# Altium PCB FS-00.PcbDoc
Units mm, origin at the board's own origin, x right, y up, seen from the top; angles counter-clockwise.
Board outline 194.8 x 15.3 mm, 2 copper layers (Top Layer, Bottom Layer), stack 1.571 mm thick; 34 components, 23 nets, 85 pads, 9 vias.
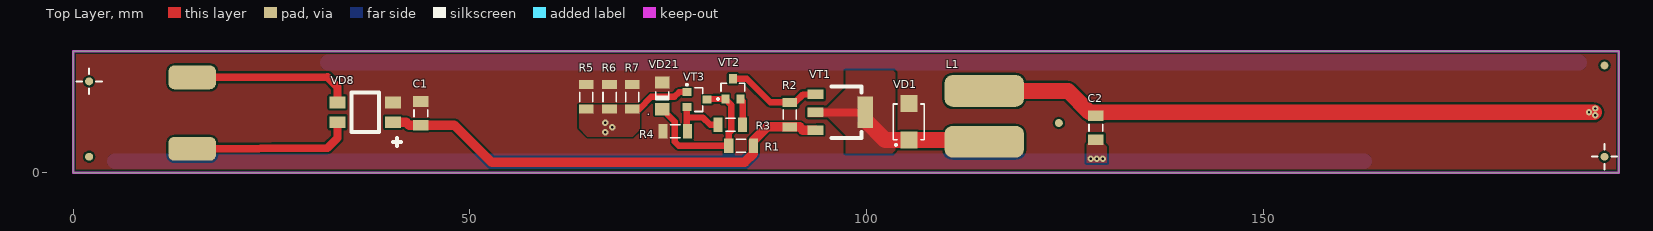
[diagram p0: Top Layer view]
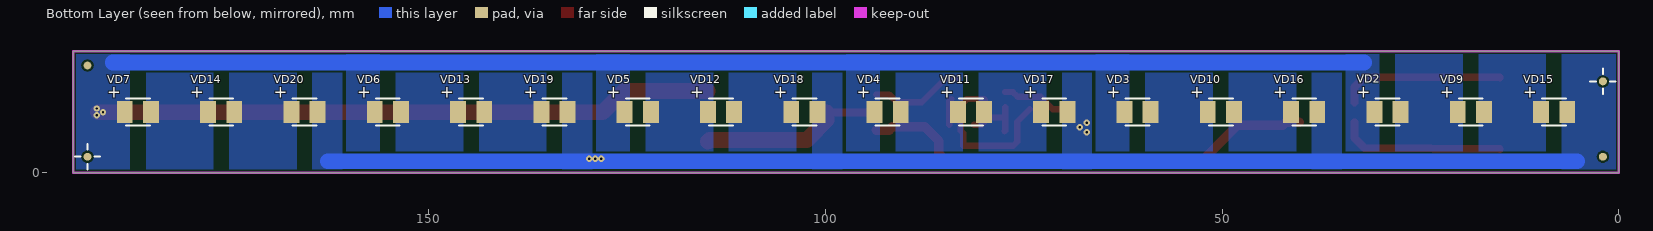
[diagram p1: Bottom Layer view, seen from below]
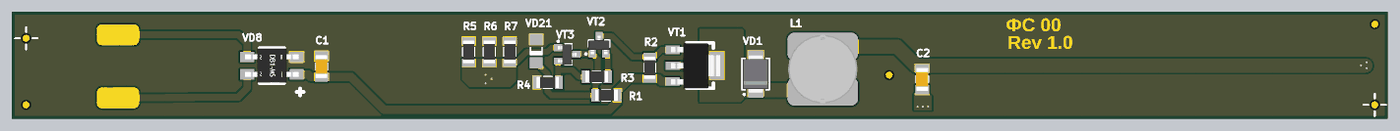
[diagram p2: 3D render of the assembled board from above, using the file's embedded part models]
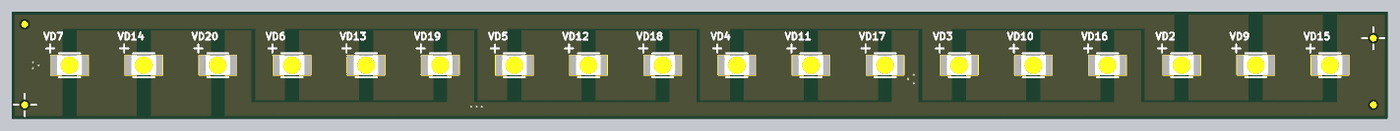
[diagram p3: 3D render of the assembled board from below, using the file's embedded part models]

## Layer stack, top to bottom
Top Solder: solder mask 0.0102, Solder Resist, Dk 3.5
Top Layer: signal copper 0.0356
Dielectric 1: dielectric 1.5, FR-4, Dk 4.8
Bottom Layer: signal copper 0.0356
Bottom Solder: solder mask 0.0102, Solder Resist, Dk 3.5

## Board outline
0,0 0,15.3 194.8,15.3 194.8,0

## Design rules (kind name [scope] priority, off if disabled: settings)
Clearance [All] p1: gap=0.254 ignorepadtopadclearanceinfootprint=FALSE except(0: Arc-Hole Track-Hole SMDPad-Hole THPad-Hole Via-Hole Fill-Hole Poly-Hole Region-Hole Text-Hole)
PolygonConnect [All] p1: thpad.connectstyle=Relief thpad.reliefconductorwidth=0.254 thpad.reliefentries=4 thpad.polygonreliefangle="90 Angle" thpad.airgapwidth=0.254 smdpad.connectstyle=Direct smdpad.reliefconductorwidth=0.254 smdpad.reliefentries=4 smdpad.polygonreliefangle="90 Angle" smdpad.airgapwidth=0.254 via.connectstyle=Direct via.reliefconductorwidth=0.254 via.reliefentries=4 via.polygonreliefangle="90 Angle" via.airgapwidth=0.254
RoutingVias [All] p1: holewidth=0.711 width=1.27 viastyle="Through Hole" minholewidth=0.711 minwidth=1.27 maxholewidth=0.711 maxwidth=1.27
SolderMaskExpansion [All] p1: expansion=0.102
Width [All] p1: maxlimit=5 minlimit=0.254 preferedwidth=2
30 further rules are at their usual default settings.

## Components (designator, comment, footprint, x,y, rotation, side; value= is the part's Value field where it differs from the comment)
C1 "Capacitor" CAP1206 43.825,7.475 r270 top value="0.1 uF"
C2 "Capacitor" CAP1206 128.9,5.65 r90 top value="4.7 uF"
L1 "coil" SDR1006 114.825,7.1 r90 top value=SDR1006-101KL
R1 "Resistor" RES1206 84.175,3.375 r0 top value="10 kOm"
R2 "Resistor" RES1206 90.325,7.3 r90 top value="120 Om"
R3 "Resistor" RES1206 82.825,6.025 r0 top value="240 Om"
R4 "Resistor" RES1206 75.875,5.2 r0 top value="10 Om"
R5 "Resistor" RES1206 64.675,9.55 r270 top value="5.6 Om"
R6 "Resistor" RES1206 67.6,9.55 r270 top value="5.6 Om"
R7 "Resistor" RES1206 70.475,9.55 r270 top value="5.6 Om"
VD1 "Schottky" SMB1 105.325,6.4 r90 top value=SS210
VD2 "LED" LED_SAKURA 29.15,7.65 r180 bottom value=SEL-2835-R62-2V060
VD3 "LED" LED_SAKURA 60.65,7.65 r180 bottom value=SEL-2835-R62-2V060
VD4 "LED" LED_SAKURA 92.15,7.65 r180 bottom value=SEL-2835-R62-2V060
VD5 "LED" LED_SAKURA 123.65,7.65 r180 bottom value=SEL-2835-R62-2V060
VD6 "LED" LED_SAKURA 155.15,7.65 r180 bottom value=SEL-2835-R62-2V060
VD7 "LED" LED_SAKURA 186.65,7.65 r180 bottom value=SEL-2835-R62-2V060
VD8 "Diode Bridge" db-1ms 36.8,7.6 r270 top value=B1S
VD9 "LED" LED_SAKURA 18.65,7.65 r180 bottom value=SEL-2835-R62-2V060
VD10 "LED" LED_SAKURA 50.15,7.65 r180 bottom value=SEL-2835-R62-2V060
VD11 "LED" LED_SAKURA 81.65,7.65 r180 bottom value=SEL-2835-R62-2V060
VD12 "LED" LED_SAKURA 113.15,7.65 r180 bottom value=SEL-2835-R62-2V060
VD13 "LED" LED_SAKURA 144.65,7.65 r180 bottom value=SEL-2835-R62-2V060
VD14 "LED" LED_SAKURA 176.15,7.65 r180 bottom value=SEL-2835-R62-2V060
VD15 "LED" LED_SAKURA 8.15,7.65 r180 bottom value=SEL-2835-R62-2V060
VD16 "LED" LED_SAKURA 39.65,7.65 r180 bottom value=SEL-2835-R62-2V060
VD17 "LED" LED_SAKURA 71.15,7.65 r180 bottom value=SEL-2835-R62-2V060
VD18 "LED" LED_SAKURA 102.65,7.65 r180 bottom value=SEL-2835-R62-2V060
VD19 "LED" LED_SAKURA 134.15,7.65 r180 bottom value=SEL-2835-R62-2V060
VD20 "LED" LED_SAKURA 165.65,7.65 r180 bottom value=SEL-2835-R62-2V060
VD21 "Zenner" minimelf 74.25,9.675 r90 top value=BZV55-C8V2
VT1 "PNP" SOT223 95.125,7.5 r270 top value=BCP53
VT2 "NPN" "SOT 23" 83.15,10.55 r90 top value=MMBTA42
VT3 "NPN" "SOT 23" 78.625,9.2 r0 top value=BC847C

## Footprints (in the part's own frame and the unit in brackets; to place one, negate y for a bottom-side part, rotate by r counter-clockwise, add the part's x,y. Pads: shape width x height; smd on the part's side, far side on the other; paste and mask are expansions set on the pad)
CAP1206 [mm]
  rect 1.35x1.95 smd: 1(-1.5,0) 2(1.5,0)
  silkscreen extent -0.45,-0.88 0.45,0.88, body extent -1.65,-0.85 1.65,0.85, height 1.5
db-1ms [mm]
  rect 1.5x2 smd: 1(1.25,3.5) 2(-1.25,3.5) 3(-1.25,-3.5) 4(1.25,-3.5)
  silkscreen extent -2.5,-1.75 4.25,4.5, body extent -2.45,-3.8 2.45,3.8, height 2.9
LED_SAKURA [mm]
  rect 2x2.8 smd: 1(1.651,0) 2(-1.651,0)
  silkscreen extent -1.5,-1.7 1.5,1.7, body extent -1.78,-1.4 1.78,1.4, height 0.7
minimelf [mm] "MELF Diode, 2-Leads, Body 3,50x1,65mm, IPC Medium Density"
  rect 1.55x1.85 smd: 1(-1.675,0) 2(1.675,0)
  silkscreen extent -0.5,-0.83 0.5,0.83, body extent -1.85,-0.85 1.85,0.85, height 1.69
RES1206 [mm] "Chip Resistor, 2-Leads, Body 3,20x1,60mm, IPC Medium Density"
  rect 1.15x1.85 smd: 1(-1.55,0) 2(1.55,0)
  silkscreen extent -0.6,-0.82 0.6,0.82, body extent -1.6,-0.8 1.6,0.8, height 0.6
SDR1006 [mm]
  rrect50% 4x10 smd: 1(-3.2,0) 2(3.2,0)
  body extent -4.9,-4.9 4.9,4.9, height 5.8
SMB1 [mm] "Molded Diode, 2-Leads, Body 4,25x3,60mm, IPC Medium Density"
  rect 2.1x2.15 smd: 1(-2.3,0) 2(2.3,0)
  silkscreen extent -3.02,-1.95 2.25,1.95, body extent -2.7,-1.8 2.7,1.8, height 2.3
SOT223 [mm]
  rect 1.2x2 smd: 1(-2.35,-1.55) 2(-0.1,-1.55) 3(2.15,-1.55)
  rect 4x2 smd: 2(-0.1,4.7)
  silkscreen extent -3.35,0.45 3.15,4.2, body extent -3.35,-1.78 3.15,5.18, height 1.7
"SOT 23" [mm] "SOT23, 3-Leads, Body 2,90x2,45mm, Pitch 0,95mm, IPC Medium Density"
  rect 1.15x1 smd: 1(-1.275,0.95) 2(-1.275,-0.95) 3(1.275,0)
  silkscreen extent -1.4,-1.5 0.7,2, body extent -1.3,-1.5 1.3,1.5, height 1.1

## Free pads (board coordinates)
  rrect50% 6x3 smd paste-3: 1(15,3) 1(15,12)
  round 1 smd far side paste-3 mask+0.2: 2(2,2) 2(2,11.5) 2(193,2) 2(193,13.5)
  round 1 smd paste-3 mask+0.2: 2(2,2) 2(2,11.5) 2(124.225,6.25) 2(193,2) 2(193,13.5)

## Via types
v1: diameter 0.8, hole 0.3, Top Layer to Bottom Layer, tented both sides, 9 vias

## Nets (pads, with @x,y where several pads share a name; then routed paths per layer and width w, separated by ;. In a path a pad name is that pad's centre, name@x,y a point inside that pad or via, vN(x,y) a via of type N, cw(c..) or ccw(c..) an arc to the next point about the centre after c; other vN are vias at no path point)
GND: C1.1 R4.1 R5.1 R6.1 R7.1 VD1.2 VD8.2 VD21.2
NetC1_2: C1.2 R1.2 R2.1 VD8.1 VT1.3 | length 58.3
  Top Layer w1.2: VD8.1 41.95,6.35 42.325,5.975 C1.2 48.05,5.975 52.725,1.3 84.625,1.3 85.725,2.4 R1.2 85.725,4.025 87.45,5.75 R2.1 91.55,5.75 91.95,5.35 VT1.3
NetC2_1: C2.1 R5.2 R6.2 R7.2 VD15.1 VD16.1 VD17.1 VD18.1 VD19.1 VD20.1 VT3.1 | length 165.2
  Top Layer w0.8: R7.2 71.325,8 72.875,9.55 75.775,9.55 76.375,10.15 VT3.1
  Bottom Layer w2: 5.271,1.425 162.675,1.425
  other v1: 128.25,1.75 129,1.75 129.75,1.75 67.05,5.075 67.925,5.7 67.075,6.275
NetC2_2: C2.2 L1.2 VD2.2 VD3.2 VD4.2 VD5.2 VD6.2 VD7.2 | length 235.7
  Top Layer w2: L1.2 125.375,10.3 128.075,7.6 191.675,7.6
  Bottom Layer w2: 32.125,13.875 189.825,13.875
  other v1: 191.85,7.225 191.05,7.625 191.85,8.075
NetL1_1: L1.1 VD1.1 VT1.2 | length 23.4
  Top Layer w1: VT1.2@93.575,7.6 VT1.2@99.825,7.6
  Top Layer w2: VT1.2@99.825,7.6 99.825,6.625 102.35,4.1 VD1.1 114.625,4.1 L1.1
NetR1_1: R1.1 VD21.1 VT2.1 VT3.3 | length 20.5
  Top Layer w0.8: VD21.1 75.825,6.425 75.825,3.875 76.325,3.375 R1.1 82.625,4.95 82.95,5.275 82.95,8.525 VT2.1 79.975,9.275 VT3.3
NetR2_2: R2.2 VT1.1 VT2.3 | length 12.1
  Top Layer w0.8: VT2.3 84.875,11.825 87.85,8.85 R2.2 90.975,8.85 91.975,9.85 VT1.1
NetR3_1: R3.1 R4.2 VT3.2 | length 7.4
  Top Layer w0.8: VT3.2 77.35,6.95 ; R4.2 77.35,5.275 77.35,6.95 ; R3.1 80.275,6.025 79.35,6.95 77.35,6.95
NetR3_2: R3.2 VT2.2 | length 3.4
  Top Layer w0.8: VT2.2 84.375,9 R3.2
NetVD2_1: VD2.1 VD9.2
NetVD3_1: VD3.1 VD10.2
NetVD4_1: VD4.1 VD11.2
NetVD5_1: VD5.1 VD12.2
NetVD6_1: VD6.1 VD13.2
NetVD7_1: VD7.1 VD14.2
NetVD8_3: pad.1@15,12 VD8.3 | length 20.7
  Top Layer w1: pad.1@15,12 32.05,12.025 33.3,10.775 VD8.3
NetVD8_4: pad.1@15,3 VD8.4 | length 20.8
  Top Layer w1: pad.1@15,3 32.05,3.1 33.3,4.35 VD8.4
NetVD9_1: VD9.1 VD15.2
NetVD10_1: VD10.1 VD16.2
NetVD11_1: VD11.1 VD17.2
NetVD12_1: VD12.1 VD18.2
NetVD13_1: VD13.1 VD19.2
NetVD14_1: VD14.1 VD20.2

## Polygon pours and split planes (outlines as drawn)
NetVD4_1 on Bottom Layer "Top Layer, Top-No Net" (solid, pour order 102): 91.15,15.3 82.675,15.3 82.675,0.025 91.15,0.025
NetVD11_1 on Bottom Layer "Top Layer, Top-No Net" (solid, pour order 100): 80.675,15.3 72.175,15.3 72.175,0.025 80.675,0.025
NetC2_2 on Bottom Layer "Top Layer, Top-No Net" (solid, pour order 96): 65.9,15.3 61.675,15.3 61.675,0.01 65.9,0
NetVD3_1 on Bottom Layer "Top Layer, Top-No Net" (solid, pour order 94): 59.675,15.3 51.175,15.3 51.175,0.025 59.675,0.025
NetVD10_1 on Bottom Layer "Top Layer, Top-No Net" (solid, pour order 92): 49.175,15.3 40.675,15.3 40.675,0.025 49.175,0.025
NetC2_2 on Bottom Layer "Top Layer, Top-No Net" (solid, pour order 88): 34.4,15.3 30.175,15.3 30.175,0.01 34.4,0
NetVD2_1 on Bottom Layer "Top Layer, Top-No Net" (solid, pour order 86): 28.175,15.3 19.675,15.3 19.675,0.025 28.175,0.025
NetVD9_1 on Bottom Layer "Top Layer, Top-No Net" (solid, pour order 84): 17.675,15.3 9.175,15.3 9.175,0.025 17.675,0.025
NetC2_2 on Bottom Layer "Top Layer, Top-No Net" (solid, pour order 76): 97.375,15.3 93.15,15.3 93.15,0.01 97.375,0
NetVD12_1 on Bottom Layer "Top Layer, Top-No Net" (solid, pour order 74): 112.15,15.3 103.65,15.3 103.65,0.025 112.15,0.025
NetVD5_1 on Bottom Layer "Top Layer, Top-No Net" (solid, pour order 72): 122.65,15.3 114.15,15.3 114.15,0.025 122.65,0.025
NetC2_2 on Bottom Layer "Top Layer, Top-No Net" (solid, pour order 70): 128.875,15.3 124.65,15.3 124.65,0.01 128.875,0
NetVD13_1 on Bottom Layer "Top Layer, Top-No Net" (solid, pour order 66): 143.65,15.3 135.15,15.3 135.15,0.025 143.65,0.025
NetVD6_1 on Bottom Layer "Top Layer, Top-No Net" (solid, pour order 64): 154.15,15.3 145.65,15.3 145.65,0.025 154.15,0.025
NetC2_2 on Bottom Layer "Top Layer, Top-No Net" (solid, pour order 62): 160.375,15.3 156.15,15.3 156.15,0.01 160.375,0
NetVD7_1 on Bottom Layer "Top Layer, Top-No Net" (solid, pour order 56): 185.625,15.3 177.15,15.3 177.15,0.025 185.625,0.025
NetVD14_1 on Bottom Layer "Top Layer, Top-No Net" (solid, pour order 58): 175.15,15.3 166.65,15.3 166.65,0.025 175.15,0.025
NetC2_1 on Bottom Layer "Top Layer, Top-No Net" (solid, pour order 60): 164.65,15.3 160.875,15.3 160.875,0.025 164.65,0
NetC2_1 on Bottom Layer "Top Layer, Top-No Net" (solid, pour order 68): 133.15,15.3 129.375,15.3 129.375,0.025 133.15,0
NetC2_1 on Bottom Layer "Top Layer, Top-No Net" (solid, pour order 78): 101.65,15.3 97.875,15.3 97.875,0.025 101.65,0
NetC2_1 on Bottom Layer "Top Layer, Top-No Net" (solid, pour order 80): 7.175,15.3 0,15.3 0,0.048 7.175,0
NetC2_1 on Bottom Layer "Top Layer, Top-No Net" (solid, pour order 90): 38.675,15.3 34.9,15.3 34.9,0.025 38.675,0
NetC2_2 on Bottom Layer "Top Layer, Top-No Net" (solid, pour order 54): 187.675,0.075 187.675,15.3 194.8,15.3 194.8,0 194.725,0.075
NetC2_1 on Bottom Layer "Top Layer, Top-No Net" (solid, pour order 98): 70.175,15.3 66.4,15.3 66.4,0.025 70.175,0
NetC2_1 on Top Layer "Bottom Layer-No Net 1" (solid, pour order 110): 130.25,1.239 130.25,3.25 129.75,3.75 127.941,3.75 127.75,3.559 127.75,1.239
GND on Top Layer "Top Layer, Top-No Net" (solid, pour order 108): 0,0.1 0,15.4 194.8,15.4 194.8,0.1
NetC2_1 on Top Layer "Top Layer, Top-No Net" (solid, pour order 104): 63.75,8.575 71.35,8.575 71.4,8.525 71.4,5.4 70.55,4.55 64.8,4.55 63.75,5.6
NetL1_1 on Top Layer "Top Layer, Top-No Net" (solid, pour order 106): 92.55,8.175 95.025,8.175 97.375,10.525 97.375,12.85 103.375,12.85 103.625,12.6 103.625,2.825 103.225,2.425 97.375,2.425 97.375,4.7 95.075,7 92.55,7

## Keep-outs
Keep-Out Layer:
  the board outline again, w0.3

## Silkscreen, mask and mechanical layers (free items; w line width, h text height)
Top Overlay:
  lines w0.254: 0.4,11.5 1.1,11.5 ; 2,9.9 2,10.6 ; 2,12.4 2,13.1 ; 2.9,11.5 3.6,11.5 ; 191.4,2 192.1,2 ; 193,0.4 193,1.1 ; 193,2.9 193,3.6 ; 193.9,2 194.6,2
Bottom Overlay:
  lines w0.254: 0.4,11.5 1.1,11.5 ; 2,9.9 2,10.6 ; 2,12.4 2,13.1 ; 2.9,11.5 3.6,11.5 ; 191.4,2 192.1,2 ; 193,0.4 193,1.1 ; 193,2.9 193,3.6 ; 193.9,2 194.6,2
Top Solder:
  text "ФС 00" at 140.75,12.5 h3
  text "Rev 1.0" at 141,10 h3
Mechanical 4:
  lines w0.05: -0.225,7.65 3.375,7.65 194.975,7.65 ; 8.15,5.925 8.15,9.375 ; 18.65,5.925 18.65,9.375 ; 29.15,5.925 29.15,9.375 ; 39.65,5.925 39.65,9.375 ; 50.15,5.925 50.15,9.375 ; 60.65,5.925 60.65,9.375 ; 71.15,5.925 71.15,9.375 ; 81.65,5.925 81.65,9.375 ; 92.15,5.925 92.15,9.375 ; 102.65,5.925 102.65,9.375 ; 113.15,5.925 113.15,9.375 ; 123.65,5.925 123.65,9.375 ; 134.15,5.925 134.15,9.375 ; 144.65,5.925 144.65,9.375 ; 155.15,5.925 155.15,9.375 ; 165.65,5.925 165.65,9.375 ; 176.15,5.925 176.15,9.375 ; 186.65,5.925 186.65,9.375

## Text inside footprints (layer, text, board x,y; h text height)
VD2: Bottom Overlay "+" at 33.025,9.45 h1.52
VD3: Bottom Overlay "+" at 64.525,9.45 h1.52
VD4: Bottom Overlay "+" at 96.025,9.45 h1.52
VD5: Bottom Overlay "+" at 127.525,9.45 h1.52
VD6: Bottom Overlay "+" at 159.025,9.45 h1.52
VD7: Bottom Overlay "+" at 190.525,9.45 h1.52
VD9: Bottom Overlay "+" at 22.525,9.45 h1.52
VD10: Bottom Overlay "+" at 54.025,9.45 h1.52
VD11: Bottom Overlay "+" at 85.525,9.45 h1.52
VD12: Bottom Overlay "+" at 117.025,9.45 h1.52
VD13: Bottom Overlay "+" at 148.525,9.45 h1.52
VD14: Bottom Overlay "+" at 180.025,9.45 h1.52
VD15: Bottom Overlay "+" at 12.025,9.45 h1.52
VD16: Bottom Overlay "+" at 43.525,9.45 h1.52
VD17: Bottom Overlay "+" at 75.025,9.45 h1.52
VD18: Bottom Overlay "+" at 106.525,9.45 h1.52
VD19: Bottom Overlay "+" at 138.025,9.45 h1.52
VD20: Bottom Overlay "+" at 169.525,9.45 h1.52